# Altium PCB uart.PcbDoc (part 3 of 3)
Units mil, origin at the board's own origin, x right, y up, seen from the top; angles counter-clockwise.
Board outline 2765.94 x 3947.04 mil, 2 copper layers (Top Layer, Bottom Layer); 105 components, 93 nets, 344 pads, 42 vias.
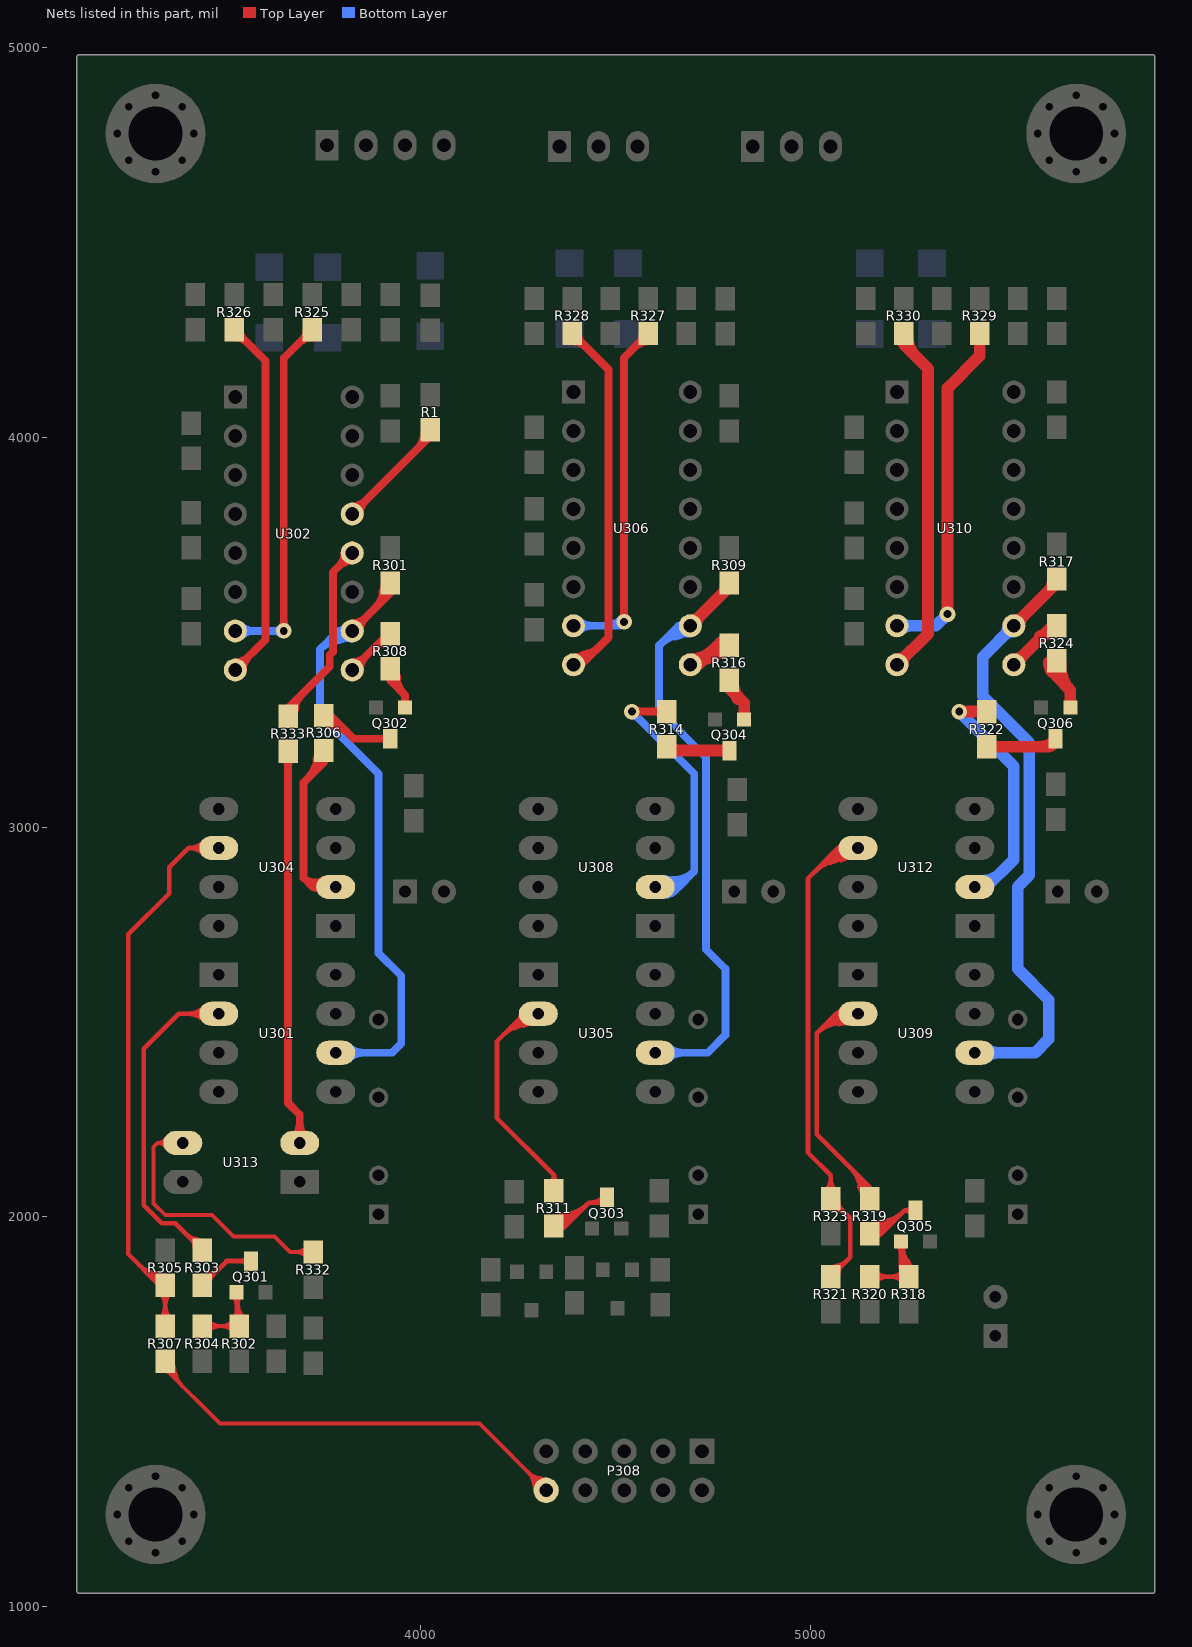
[diagram p3: the nets of this part, all layers, seen from the top]

## Via types
v1: diameter 40, hole 20, Top Layer to Bottom Layer, 40 vias
v2: diameter 50, hole 28, Top Layer to Bottom Layer, 2 vias

## Nets (pads, with @x,y where several pads share a name; then routed paths per layer and width w, separated by ;. In a path a pad name is that pad's centre, name@x,y a point inside that pad or via, vN(x,y) a via of type N, cw(c..) or ccw(c..) an arc to the next point about the centre after c; other vN are vias at no path point) (continued)
NetP308_10: P308.10 R307.2 | length 2076.5
  Top Layer w10: R307.2@3342.55,1615.31 cw(c3335.58,1587.78) 3363,1595.13 ; R307.2@3345,1630 3345,1610 3485,1470 4150.94,1470 P308.10@4322.2,1298.74 ; R307.2@3349.06,1634.14 cw(c3334.8,1602.06) R307.2@3368.71,1611.14 ; R307.2@3360.79,1603.39 cw(c3375.58,1607.35) R307.2@3362.32,1615 ; 3374.14,1590.91 ccw(c3323.86,1577.43) R307.2@3345,1625 ; 4286.47,1329.48 ccw(c4330.94,1341.39) P308.10@4321.7,1296.29 ; 4290.66,1313.85 ccw(c4327.31,1323.67) P308.10@4319.7,1286.49 ; 4291.47,1334.48 cw(c4279.55,1290.01) P308.10@4324.65,1299.24 ; 4307.1,1330.29 cw(c4297.28,1293.64) P308.10@4334.45,1301.25 ; R307.2@3345,1625 ccw(c3381.21,1625) 3355.61,1599.39 cw(c3381.21,1625) R307.2@3345,1625 ; 4275.26,1345.69 cw(c4228.31,1298.74) 4294.7,1298.74 ccw(c4228.31,1298.74) 4275.26,1345.69 ; 4275.26,1345.69 ccw(c4322.2,1392.63) 4322.2,1326.24 cw(c4322.2,1392.63) 4275.26,1345.69 ; 4292.33,1328.61 cw(c4262.46,1298.74) 4304.7,1298.74 ccw(c4262.46,1298.74) 4292.33,1328.61 ; 4292.33,1328.61 ccw(c4322.2,1358.49) 4322.2,1316.24 cw(c4322.2,1358.49) 4292.33,1328.61 ; R307.2@3345,1605 cw(c3345,1592.93) 3353.54,1601.46 ccw(c3345,1592.93) R307.2@3345,1605 ; R307.2@3355,1625 ccw(c3415.36,1625) 3372.68,1582.32 cw(c3415.36,1625) R307.2@3355,1625 ; R307.2@3365,1625 ccw(c3449.5,1625) 3389.75,1565.25 cw(c3449.5,1625) R307.2@3365,1625
NetQ301_1: Q301.1 R302.1 R304.2 | length 867.8
  Top Layer w10: R304.2@3440,1720 R302.1@3535,1720 3527.2,1727.8 Q301.1@3527.2,1806.85 ; Q301.1@3520.28,1795.85 cw(c3509.52,1778.74) 3529.23,1783.23 ; 3532.73,1767.82 cw(c3574.23,1777.26) Q301.1@3538.21,1799.93 ; 3486.72,1720 cw(c3486.72,1671.72) 3520.86,1705.86 ccw(c3486.72,1671.72) 3486.72,1720 ; 3486.72,1720 ccw(c3486.72,1768.28) 3520.86,1734.14 cw(c3486.72,1768.28) 3486.72,1720 ; 3488.28,1720 cw(c3488.28,1768.28) 3454.14,1734.14 ccw(c3488.28,1768.28) 3488.28,1720 ; 3488.28,1720 ccw(c3488.28,1671.72) 3454.14,1705.86 cw(c3488.28,1671.72) 3488.28,1720 ; 3527.2,1775.47 cw(c3558.59,1775.47) 3536.4,1797.66 ccw(c3558.59,1775.47) 3527.2,1775.47 ; 3527.2,1775.47 ccw(c3495.82,1775.47) 3518.01,1797.66 cw(c3495.82,1775.47) 3527.2,1775.47 ; R302.1@3520.86,1739.14 ccw(c3505.54,1754.46) 3527.2,1754.46 cw(c3505.54,1754.46) R302.1@3520.86,1739.14 ; 3527.2,1767.96 ccw(c3577.96,1767.96) 3542.07,1732.07 cw(c3577.96,1767.96) 3527.2,1767.96 ; Q301.1@3527.2,1792.1 ccw(c3602.1,1792.1) 3549.14,1739.14 cw(c3602.1,1792.1) Q301.1@3527.2,1792.1
NetQ301_3: Q301.3 R303.1 | length 463.6
  Top Layer w12: R303.1@3435.21,1831.45 cw(c3467.04,1821.83) R303.1@3458.43,1853.94 ; R303.1@3442.2,1826.85 3502.2,1886.85 Q301.3@3565.2,1886.85 ; 3536.23,1886.85 cw(c3536.23,1857.88) 3556.72,1878.37 ccw(c3536.23,1857.88) 3536.23,1886.85 ; 3536.23,1886.85 ccw(c3536.23,1915.82) 3556.72,1895.34 cw(c3536.23,1915.82) 3536.23,1886.85 ; R303.1@3440,1837 ccw(c3440,1866.83) 3461.09,1845.74 cw(c3440,1866.83) R303.1@3440,1837 ; R303.1@3440,1849 ccw(c3440,1907.8) 3481.58,1866.22 cw(c3440,1907.8) R303.1@3440,1849 ; R303.1@3459,1830 cw(c3491.94,1830) 3468.65,1853.29 ccw(c3491.94,1830) R303.1@3459,1830
NetQ302_1: Q302.1 R308.1 | length 413.5
  Top Layer w20: R308.1@3922.2,3406.85 3922.2,3376.85 3960.2,3338.85 ; R308.1@3925.01,3405.99 cw(c3904.01,3375.05) R308.1@3940.74,3382.07 ; Q302.1@3960.2,3306.85 3960.2,3338.85 ; 3960.2,3326.16 cw(c3940.89,3326.16) 3954.55,3312.51 ccw(c3940.89,3326.16) 3960.2,3326.16 ; 3960.2,3326.16 ccw(c3979.52,3326.16) 3965.86,3312.51 cw(c3979.52,3326.16) 3960.2,3326.16 ; 3960.2,3338.85 cw(c4016.33,3394.98) 3937.16,3400.76 ccw(c4016.33,3394.98) 3960.2,3338.85 ; R308.1@3917.22,3402.21 ccw(c3958.72,3399.18) 3929.3,3369.76 cw(c3958.72,3399.18) R308.1@3917.22,3402.21
NetQ302_3: Q302.3 R306.1 | length 481.7
  Top Layer w20: R306.1@3747.87,3279.35 ccw(c3780.26,3298.05) R306.1@3770.58,3261.93 ; Q302.3@3922.2,3226.85 3828.15,3226.85 3768.15,3286.85 R306.1@3752.2,3286.85 ; R306.1@3752.2,3286.85 cw(c3752.2,3248.36) 3779.42,3275.58 ccw(c3752.2,3248.36) R306.1@3752.2,3286.85 ; 3902.89,3226.85 cw(c3902.89,3207.54) 3916.55,3221.19 ccw(c3902.89,3207.54) 3902.89,3226.85 ; 3902.89,3226.85 ccw(c3902.89,3246.16) 3916.55,3232.51 cw(c3902.89,3246.16) 3902.89,3226.85 ; R306.1@3752.2,3266.85 cw(c3752.2,3180.07) 3813.57,3241.43 ccw(c3752.2,3180.07) R306.1@3752.2,3266.85
NetQ303_3: Q303.3 R311.2 | length 898.4
  Top Layer w12: R311.2@4337.96,1984.5 cw(c4381.07,1957.62) 4369.59,2007.11 ; R311.2@4348.14,1978.15 cw(c4415.84,1935.95) 4397.81,2013.65 ; R311.2@4348.19,1978.22 cw(c4382.39,1957.5) 4372.86,1996.33 ; R311.2@4352.05,1998.1 ccw(c4363.86,2017.59) 4369.29,1995.46 ; R311.2@4360.32,1976.12 cw(c4370.36,1972.94) 4367.85,1983.17 cw(c4366.36,1989.25) R311.2@4360.37,1987.42 ; 4372.2,1976.85 4432.2,2036.85 ; Q303.3@4462.2,2036.85 4432.2,2036.85 ; 4432.2,2036.85 cw(c4345.22,2123.83) 4342.61,2000.85 ccw(c4345.22,2123.83) 4432.2,2036.85 ; R311.2@4341.84,1964.85 ccw(c4342.74,2007) 4372.55,1977.19 cw(c4342.74,2007) R311.2@4341.84,1964.85 ; R311.2@4342.1,1976.85 ccw(c4343.57,2045.94) 4392.43,1997.08 cw(c4343.57,2045.94) R311.2@4342.1,1976.85 ; R311.2@4342.35,1988.85 ccw(c4344.39,2084.88) 4412.32,2016.96 cw(c4344.39,2084.88) R311.2@4342.35,1988.85 ; 4434.18,2036.85 ccw(c4434.18,2086.82) 4469.51,2051.49 cw(c4434.18,2086.82) 4434.18,2036.85
NetQ304_1: Q304.1 R316.1 | length 255.4
  Top Layer w30: R316.1@4787.2,3363.19 cw(c4758.64,3313.72) 4813.82,3328.51 ; R316.1@4792.2,3376.85 4792.2,3356.85 4830.2,3318.85 Q304.1@4830.2,3276.85 ; R316.1@4802.2,3371.85 ccw(c4862.56,3371.85) 4819.88,3329.17 cw(c4862.56,3371.85) R316.1@4802.2,3371.85
NetQ304_3: Q304.3 R314.1 | length 228.9
  Top Layer w30: R314.1@4632.2,3206.85 4642.2,3196.85 Q304.3@4792.2,3196.85 ; R314.1@4639.28,3208.92 ccw(c4668.42,3238.06) 4668.42,3196.85 cw(c4668.42,3238.06) R314.1@4639.28,3208.92
NetQ305_1: Q305.1 R318.1 R320.2 | length 1100.8
  Top Layer w12: R320.2@5152.2,1846.85 R318.1@5252.2,1846.85 5232.2,1866.85 Q305.1@5232.2,1936.85 ; Q305.1@5226.2,1926.46 cw(c5211.72,1901.37) 5239.7,1908.87 cw(c5267.69,1916.36) Q305.1@5242.6,1930.85 ; R318.1@5237.09,1863.37 ccw(c5222.27,1874.66) 5237.67,1885.17 ; R318.1@5238.53,1865.04 ccw(c5218.44,1884.41) 5241.49,1900.13 ; 5241.14,1880.07 ccw(c5259.97,1892.91) R318.1@5255.73,1870.52 ; R318.1@5247.17,1856.71 ccw(c5229.29,1873.95) 5249.8,1887.94 ; 5198.07,1846.85 cw(c5198.07,1892.72) 5165.64,1860.29 ccw(c5198.07,1892.72) 5198.07,1846.85 ; 5198.07,1846.85 ccw(c5198.07,1800.98) 5165.64,1833.42 cw(c5198.07,1800.98) 5198.07,1846.85 ; 5206.33,1846.85 cw(c5206.33,1800.98) 5238.77,1833.42 ccw(c5206.33,1800.98) 5206.33,1846.85 ; 5206.33,1846.85 ccw(c5206.33,1892.72) 5238.77,1860.29 cw(c5206.33,1892.72) 5206.33,1846.85 ; 5232.2,1907.88 cw(c5261.18,1907.88) 5240.69,1928.37 ccw(c5261.18,1907.88) 5232.2,1907.88 ; 5232.2,1907.88 ccw(c5203.23,1907.88) 5223.72,1928.37 cw(c5203.23,1907.88) 5232.2,1907.88 ; Q305.1@5232.2,1936.85 ccw(c5325.32,1936.85) 5264.6,1866.25 cw(c5325.32,1936.85) Q305.1@5232.2,1936.85 ; 5232.2,1884.54 ccw(c5280.33,1884.54) 5248.94,1848.06 cw(c5280.33,1884.54) 5232.2,1884.54 ; 5232.2,1910.69 ccw(c5302.82,1910.69) 5256.77,1857.16 cw(c5302.82,1910.69) 5232.2,1910.69
NetQ305_3: Q305.3 R319.2 | length 998.3
  Top Layer w12: R319.2@5147.96,1964.5 cw(c5191.07,1937.62) 5179.59,1987.11 ; R319.2@5152.2,1956.85 5182.2,1956.85 ; R319.2@5158.14,1958.15 cw(c5225.84,1915.95) 5207.81,1993.65 ; R319.2@5158.19,1958.22 cw(c5192.39,1937.5) 5182.86,1976.33 ; R319.2@5162.05,1978.1 ccw(c5173.86,1997.59) 5179.29,1975.46 ; R319.2@5170.32,1956.12 cw(c5180.36,1952.94) 5177.85,1963.17 cw(c5176.36,1969.25) R319.2@5170.37,1967.42 ; Q305.3@5270.2,2016.85 5242.2,2016.85 ; 5182.2,1956.85 cw(c5182.2,1971.03) 5169.38,1964.97 ccw(c5182.2,1971.03) 5182.2,1956.85 ; 5182.2,1956.85 ccw(c5182.2,1942.67) 5169.38,1948.73 cw(c5182.2,1942.67) 5182.2,1956.85 ; 5182.2,1956.85 5242.2,2016.85 ; 5242.2,2016.85 cw(c5155.22,2103.83) 5152.61,1980.85 ccw(c5155.22,2103.83) 5242.2,2016.85 ; 5242.21,2016.85 cw(c5242.21,1990.19) 5261.51,2008.57 ccw(c5242.21,1990.19) 5242.21,2016.85 ; 5242.21,2016.85 ccw(c5242.21,2043.51) 5261.51,2025.13 cw(c5242.21,2043.51) 5242.21,2016.85 ; R319.2@5151.84,1944.85 ccw(c5152.74,1987) 5182.55,1957.19 cw(c5152.74,1987) R319.2@5151.84,1944.85 ; R319.2@5152.1,1956.85 ccw(c5153.57,2025.94) 5202.43,1977.08 cw(c5153.57,2025.94) R319.2@5152.1,1956.85 ; R319.2@5152.35,1968.85 ccw(c5154.39,2064.88) 5222.32,1996.96 cw(c5154.39,2064.88) R319.2@5152.35,1968.85
NetQ306_1: Q306.1 R324.1 | length 389.3
  Top Layer w30: R324.1@5626.45,3413.68 cw(c5593.55,3366.98) 5649.83,3376.74 ; R324.1@5632.2,3426.85 5632.2,3386.85 5667.2,3351.85 ; Q306.1@5667.2,3306.85 5667.2,3351.85 ; 5667.2,3351.85 cw(c5728.5,3413.15) 5642.16,3420.95 ccw(c5728.5,3413.15) 5667.2,3351.85 ; R324.1@5612.29,3423.65 ccw(c5645.36,3420.66) 5621.88,3397.18 cw(c5645.36,3420.66) R324.1@5612.29,3423.65
NetQ306_3: Q306.3 R322.1 | length 351.5
  Top Layer w30: R322.1@5452.2,3206.85 5609.2,3206.85 ; Q306.3@5629.2,3226.85 5609.2,3206.85 ; 5609.21,3206.85 ccw(c5609.21,3224.35) 5626.28,3220.51 cw(c5609.21,3224.35) 5609.21,3206.85 ; 5590.58,3206.85 ccw(c5590.58,3258.48) 5627.08,3221.97 cw(c5590.58,3258.48) 5590.58,3206.85 ; Q306.3@5612.13,3209.78 cw(c5629.2,3192.71) 5629.2,3216.85 ccw(c5629.2,3192.71) Q306.3@5612.13,3209.78
NetR1_2: R1.2 U302.13 | length 620.8
  Top Layer w20: U302.13@3824.26,3803.8 cw(c3857.32,3797.03) 3848.59,3829.62 ; U302.13@3824.72,3803.7 4025,4003.98 R1.2@4025,4020 ; U302.13@3824.82,3803.24 ccw(c3818.05,3836.3) 3850.65,3827.56 ; 3858.06,3837.04 cw(c3824.72,3870.37) 3824.72,3823.23 ccw(c3824.72,3870.37) 3858.06,3837.04 ; 3858.06,3837.04 ccw(c3891.4,3803.7) 3844.25,3803.7 cw(c3891.4,3803.7) 3858.06,3837.04 ; 3991.6,3970.57 ccw(c3947.17,4015) 4010,4015 cw(c3947.17,4015) 3991.6,3970.57
NetR301_2: R301.2 U301.6 U302.10 | length 2616.7
  Top Layer w20: U302.10@3824.26,3503.8 cw(c3857.32,3497.03) 3848.59,3529.62 ; U302.10@3824.72,3503.7 3922.2,3601.18 R301.2@3922.2,3626.85 ; U302.10@3824.82,3503.24 ccw(c3818.05,3536.3) 3850.65,3527.56 ; R301.2@3902.28,3603.47 cw(c3938.4,3593.79) R301.2@3919.7,3626.18 ; 3858.06,3537.04 cw(c3824.72,3570.37) 3824.72,3523.23 ccw(c3824.72,3570.37) 3858.06,3537.04 ; 3858.06,3537.04 ccw(c3891.4,3503.7) 3844.25,3503.7 cw(c3891.4,3503.7) 3858.06,3537.04 ; 3881.98,3560.96 ccw(c3821.09,3621.85) 3907.2,3621.85 cw(c3821.09,3621.85) 3881.98,3560.96 ; 3916.12,3595.1 ccw(c3889.38,3621.85) 3927.2,3621.85 cw(c3889.38,3621.85) 3916.12,3595.1
  Bottom Layer w20: U301.6@3782.2,2421.42 3926.77,2421.42 3950.35,2445 3950.35,2618.7 3892.2,2676.85 3892.2,3136.85 3742.2,3286.85 3742.2,3456.85 ; 3783.33,3478.94 ccw(c3774.67,3541.61) U302.10@3825.1,3503.42 ; U302.10@3806.38,3510.39 cw(c3791.06,3515.97) 3793.29,3499.82 cw(c3795.42,3484.4) U302.10@3808.41,3492.96 ; U302.10@3824.72,3503.7 3789.06,3503.7 ; 3742.21,3456.85 cw(c3810.33,3388.73) 3822.3,3484.32 ccw(c3810.33,3388.73) 3742.21,3456.85 ; 3742.2,3456.85 3789.06,3503.7 ; 3789.06,3503.7 cw(c3789.06,3480.89) 3808.27,3493.18 ccw(c3789.06,3480.89) 3789.06,3503.7 ; 3789.06,3503.7 ccw(c3789.06,3526.51) 3808.27,3514.22 cw(c3789.06,3526.51) 3789.06,3503.7 ; 3851.9,2421.42 cw(c3851.9,2472.12) 3816.05,2436.27 ccw(c3851.9,2472.12) 3851.9,2421.42 ; 3851.9,2421.42 ccw(c3851.9,2370.72) 3816.05,2406.57 cw(c3851.9,2370.72) 3851.9,2421.42 ; 3771.12,3485.76 cw(c3816.76,3440.11) 3824.78,3504.17 ccw(c3816.76,3440.11) 3771.12,3485.76
NetR303_2: R303.2 U301.2 | length 1340
  Top Layer w12: R303.2@3421.72,1943.9 cw(c3413.19,1912.06) R303.2@3444.79,1921.42 ; R303.2@3440,1915 3371,1984 3336,1984 3290,2030 3290,2431.42 3380,2521.42 U301.2@3482.2,2521.42 ; 3402.85,2521.42 cw(c3402.85,2461.06) 3445.53,2503.74 ccw(c3402.85,2461.06) 3402.85,2521.42 ; 3402.85,2521.42 ccw(c3402.85,2581.77) 3445.53,2539.09 cw(c3402.85,2581.77) 3402.85,2521.42 ; 3431.82,2521.42 cw(c3431.82,2490.03) 3454.01,2512.22 ccw(c3431.82,2490.03) 3431.82,2521.42 ; 3431.82,2521.42 ccw(c3431.82,2552.8) 3454.01,2530.61 cw(c3431.82,2552.8) 3431.82,2521.42 ; 3399.03,1955.97 ccw(c3440,1996.94) 3440,1939 cw(c3440,1996.94) 3399.03,1955.97 ; 3411.1,1943.9 cw(c3387.2,1920) 3421,1920 ccw(c3387.2,1920) 3411.1,1943.9 ; R303.2@3419.51,1935.49 ccw(c3440,1955.97) 3440,1927 cw(c3440,1955.97) R303.2@3419.51,1935.49
NetR305_1: R305.1 R307.1 U304.6 | length 2360.7
  Top Layer w12: 3293.74,1862.74 cw(c3275.1,1793.19) R305.1@3338.81,1826.74 ; 3318.21,1844.18 ccw(c3324.11,1866.19) R305.1@3335.5,1846.45 ; 3320.25,1855.63 cw(c3308.19,1810.61) R305.1@3349.42,1832.33 ; R305.1@3322.36,1843.07 cw(c3316.4,1820.81) R305.1@3338.34,1827.86 ; R307.1@3345,1720 R305.1@3345,1825 ; U304.6@3513.15,2946.85 U304.6@3482.2,2946.85 3405,2946.85 ; 3345,1770.87 cw(c3299.13,1770.87) 3331.56,1738.44 ccw(c3299.13,1770.87) 3345,1770.87 ; 3345,1770.87 ccw(c3390.87,1770.87) 3358.44,1738.44 cw(c3390.87,1770.87) 3345,1770.87 ; 3345,1774.13 cw(c3390.87,1774.13) 3358.44,1806.56 ccw(c3390.87,1774.13) 3345,1774.13 ; 3345,1774.13 ccw(c3299.13,1774.13) 3331.56,1806.56 cw(c3299.13,1774.13) 3345,1774.13 ; R305.1@3345,1825 cw(c3345,1861.21) 3319.39,1835.61 ccw(c3345,1861.21) R305.1@3345,1825 ; R305.1@3345,1825 3330,1825 3250,1905 3250,2725 3355,2830 3355,2896.85 3405,2946.85 ; 3405,2946.85 cw(c3405,2891.6) 3445.07,2929.64 ccw(c3405,2891.6) 3405,2946.85 ; 3405,2946.85 ccw(c3405,3002.1) 3445.07,2964.06 cw(c3405,3002.1) 3405,2946.85 ; 3278.42,1876.58 ccw(c3345,1943.15) 3345,1849 cw(c3345,1943.15) 3278.42,1876.58 ; 3298.91,1856.09 ccw(c3345,1902.18) 3345,1837 cw(c3345,1902.18) 3298.91,1856.09
NetR306_2: R306.2 U304.2 | length 1052.4
  Top Layer w20: R306.2@3732.28,3173.47 cw(c3768.4,3163.79) R306.2@3749.7,3196.18 ; R306.2@3752.2,3196.85 3752.2,3167.2 3700,3115 3700,2870 ; U304.2@3782.2,2846.85 3723.15,2846.85 ; 3700,2870 ccw(c3729.32,2899.31) 3751.81,2864.49 cw(c3729.32,2899.31) 3700,2870 ; 3700,2870 3723.15,2846.85 ; 3723.15,2846.85 cw(c3723.15,2819.15) 3745.93,2834.91 ccw(c3723.15,2819.15) 3723.15,2846.85 ; 3723.15,2846.85 ccw(c3723.15,2874.55) 3745.93,2858.79 cw(c3723.15,2874.55) 3723.15,2846.85 ; 3709.17,3124.17 ccw(c3641.49,3191.85) 3737.2,3191.85 cw(c3641.49,3191.85) 3709.17,3124.17 ; 3717.51,2852.49 ccw(c3743.06,2878.04) 3762.66,2847.69 cw(c3743.06,2878.04) 3717.51,2852.49 ; 3743.31,3158.31 ccw(c3709.78,3191.85) 3757.2,3191.85 cw(c3709.78,3191.85) 3743.31,3158.31
  Bottom Layer w20: U304.2@3782.2,2846.85 U304.2@3822.2,2846.85
NetR308_2: R308.2 U302.9 | length 451.2
  Top Layer w20: U302.9@3824.26,3403.8 cw(c3857.32,3397.03) 3848.59,3429.62 ; U302.9@3824.72,3403.7 3917.87,3496.85 R308.2@3922.2,3496.85 ; U302.9@3824.82,3403.24 ccw(c3818.05,3436.3) 3850.65,3427.56 ; 3858.06,3437.04 cw(c3824.72,3470.37) 3824.72,3423.23 ccw(c3824.72,3470.37) 3858.06,3437.04 ; 3858.06,3437.04 ccw(c3891.4,3403.7) 3844.25,3403.7 cw(c3891.4,3403.7) 3858.06,3437.04 ; 3880.67,3459.65 cw(c3922.2,3418.11) 3922.2,3476.85 ccw(c3922.2,3418.11) 3880.67,3459.65
NetR309_2: R309.2 U305.6 U306.10 | length 2289
  Top Layer w30: U306.10@4692.2,3516.85 4792.2,3616.85 R309.2@4792.2,3626.85 R309.2@4782.2,3616.85 ; 4717,3541.65 cw(c4692.2,3566.45) 4692.2,3531.38 ccw(c4692.2,3566.45) 4717,3541.65 ; 4717,3541.65 ccw(c4741.8,3516.85) 4706.73,3516.85 cw(c4741.8,3516.85) 4717,3541.65 ; 4771.6,3596.24 ccw(c4745.99,3621.85) 4782.2,3621.85 cw(c4745.99,3621.85) 4771.6,3596.24
  Bottom Layer w20: U305.6@4602.2,2421.42 4736.77,2421.42 4782.2,2466.85 4782.2,2636.85 4732.2,2686.85 4732.2,3180 4612.2,3300 4612.2,3466.85 ; 4652.79,3489.04 ccw(c4639.43,3550.87) U306.10@4692.6,3516.59 ; U306.10@4673.43,3522.21 cw(c4657.53,3526.74) 4661.02,3510.58 cw(c4664.35,3495.16) U306.10@4676.8,3504.85 ; U306.10@4692.2,3516.85 4662.2,3516.85 ; 4612.21,3466.85 cw(c4686.13,3392.93) 4691.25,3497.35 ccw(c4686.13,3392.93) 4612.21,3466.85 ; 4612.2,3466.85 4662.2,3516.85 ; 4662.21,3516.85 cw(c4662.21,3503.57) 4674.35,3508.95 ccw(c4662.21,3503.57) 4662.21,3516.85 ; 4662.21,3516.85 ccw(c4662.21,3530.13) 4674.35,3524.75 cw(c4662.21,3530.13) 4662.21,3516.85 ; 4671.9,2421.42 cw(c4671.9,2472.12) 4636.05,2436.27 ccw(c4671.9,2472.12) 4671.9,2421.42 ; 4671.9,2421.42 ccw(c4671.9,2370.72) 4636.05,2406.57 cw(c4671.9,2370.72) 4671.9,2421.42 ; 4644.12,3498.76 cw(c4689.11,3453.77) 4692.23,3517.32 ccw(c4689.11,3453.77) 4644.12,3498.76
NetR311_1: R311.1 U305.2 | length 1192.8
  Top Layer w12: 4240,2484.84 ccw(c4223.51,2546.37) U305.2@4282.28,2521.8 ; 4245.77,2498.39 ccw(c4236.85,2531.7) U305.2@4270.51,2524.23 ; 4257.44,2501.51 cw(c4261.96,2484.63) U305.2@4270.7,2499.77 ; 4263.6,2491.16 ccw(c4251.99,2534.46) U305.2@4293.35,2517.17 ; U305.2@4302.2,2521.42 4266.77,2521.42 4196.2,2450.85 4196.2,2253.8 4342.2,2107.8 ; R311.1@4342.2,2066.85 4342.2,2107.8 ; 4342.2,2107.79 cw(c4317.71,2107.79) 4331.5,2087.55 ccw(c4317.71,2107.79) 4342.2,2107.79 ; 4342.2,2107.79 ccw(c4366.7,2107.79) 4352.91,2087.55 cw(c4366.7,2107.79) 4342.2,2107.79 ; 4212.47,2467.12 cw(c4283.2,2396.39) 4283.2,2496.42 ccw(c4283.2,2396.39) 4212.47,2467.12 ; 4232.96,2487.6 cw(c4283.2,2437.36) 4283.2,2508.42 ccw(c4283.2,2437.36) 4232.96,2487.6 ; 4252.15,2506.79 ccw(c4237.52,2521.42) 4258.2,2521.42 cw(c4237.52,2521.42) 4252.15,2506.79 ; 4253.44,2508.09 cw(c4283.2,2478.33) 4283.2,2520.42 ccw(c4283.2,2478.33) 4253.44,2508.09
NetR314_2: R314.2 U308.2 | length 1483.9
  Top Layer w20: v1(4542.2,3296.85) R314.2@4632.2,3296.85 ; 4566.35,3296.85 cw(c4566.35,3320.99) 4549.28,3303.92 ccw(c4566.35,3320.99) 4566.35,3296.85 ; 4566.35,3296.85 ccw(c4566.35,3272.71) 4549.28,3289.78 cw(c4566.35,3272.71) 4566.35,3296.85 ; 4595.99,3296.85 cw(c4595.99,3260.64) 4621.6,3286.24 ccw(c4595.99,3260.64) 4595.99,3296.85 ; 4595.99,3296.85 ccw(c4595.99,3333.06) 4621.6,3307.46 cw(c4595.99,3333.06) 4595.99,3296.85
  Bottom Layer w20: v1(4542.2,3296.85) 4702.2,3136.85 4702.2,2886.85 ; U308.2@4602.2,2846.85 4662.2,2846.85 ; U308.2@4621.9,2846.14 cw(c4672.05,2794.93) 4672.8,2866.6 ; 4559.28,3279.78 cw(c4576.35,3296.85) 4552.2,3296.85 ccw(c4576.35,3296.85) 4559.28,3279.78 ; 4559.28,3279.78 ccw(c4542.2,3262.71) 4542.2,3286.85 cw(c4542.2,3262.71) 4559.28,3279.78 ; 4662.2,2846.85 cw(c4662.2,2876.37) 4638.25,2859.12 ccw(c4662.2,2876.37) 4662.2,2846.85 ; 4662.2,2846.85 ccw(c4662.2,2817.33) 4638.25,2834.58 cw(c4662.2,2817.33) 4662.2,2846.85 ; 4662.2,2846.85 4702.2,2886.85 ; 4702.2,2886.85 cw(c4647.61,2941.44) 4626.85,2867.08 ccw(c4647.61,2941.44) 4702.2,2886.85 ; U308.2@4616.1,2828.55 ccw(c4626.48,2865.76) 4653.8,2838.44 cw(c4626.48,2865.76) U308.2@4616.1,2828.55 ; U308.2@4621.47,2847.81 ccw(c4637.05,2903.6) 4678,2862.64 cw(c4637.05,2903.6) U308.2@4621.47,2847.81
NetR316_2: R316.2 U306.9 | length 582.9
  Top Layer w12: U306.9@4692.2,3416.85 U306.9@4692.2,3424.48
  Top Layer w30: U306.9@4692.2,3416.85 4712.2,3416.85 4762.2,3466.85 R316.2@4792.2,3466.85 ; U306.9@4695.96,3430.88 ccw(c4712.85,3493.9) 4745.47,3437.4 ; 4748.86,3440.24 ccw(c4734.08,3495.41) R316.2@4783.54,3466.85 ; U306.9@4692.2,3431.38 ccw(c4692.2,3514.73) 4751.15,3455.79 cw(c4692.2,3514.73) U306.9@4692.2,3431.38 ; U306.9@4715.38,3420.03 cw(c4792.2,3343.21) 4792.2,3451.85 ccw(c4792.2,3343.21) U306.9@4715.38,3420.03 ; 4766.6,3471.24 cw(c4792.2,3445.64) 4792.2,3481.85 ccw(c4792.2,3445.64) 4766.6,3471.24
NetR317_2: R317.2 U309.6 U310.10 | length 1957.2
  Top Layer w30: U310.10@5522.2,3516.85 5632.2,3626.85 R317.2@5632.2,3636.85 ; 5547,3541.65 cw(c5522.2,3566.45) 5522.2,3531.38 ccw(c5522.2,3566.45) 5547,3541.65 ; 5547,3541.65 ccw(c5571.8,3516.85) 5536.73,3516.85 cw(c5571.8,3516.85) 5547,3541.65 ; 5611.6,3606.24 ccw(c5585.99,3631.85) 5622.2,3631.85 cw(c5585.99,3631.85) 5611.6,3606.24
  Bottom Layer w30: U309.6@5422.2,2421.42 5576.77,2421.42 5612.2,2456.85 5612.2,2556.85 5532.2,2636.85 5532.2,2846.85 5562.2,2876.85 5562.2,3216.85 5442.2,3336.85 5442.2,3436.85 U310.10@5522.2,3516.85 ; 5479.83,2421.42 cw(c5479.83,2460.04) 5452.52,2432.73 ccw(c5479.83,2460.04) 5479.83,2421.42 ; 5479.83,2421.42 ccw(c5479.83,2382.79) 5452.52,2410.1 cw(c5479.83,2382.79) 5479.83,2421.42 ; 5497.4,3492.05 cw(c5522.2,3467.25) 5522.2,3502.32 ccw(c5522.2,3467.25) 5497.4,3492.05 ; 5497.4,3492.05 ccw(c5472.6,3516.85) 5507.68,3516.85 cw(c5472.6,3516.85) 5497.4,3492.05
NetR319_1: R319.1 U309.2 | length 1917.9
  Top Layer w12: 5044.77,2492.19 ccw(c5037.54,2576.74) 5102.44,2522.06 cw(c5067.81,2551.24) 5071.66,2506.12 ; 5073.63,2494.65 ccw(c5068.88,2550.34) U309.2@5111.62,2514.33 ; 5074.34,2506.35 cw(c5075.83,2488.93) U309.2@5087.1,2502.3 ; U309.2@5079.18,2528.32 cw(c5064.4,2532.56) 5065.71,2517.24 cw(c5067.13,2500.7) U309.2@5081.52,2508.97 ; 5118.64,2106.22 ccw(c5195.48,2126.81) R319.1@5155.7,2057.91 ; U309.2@5122.2,2521.42 5066.77,2521.42 ; 5126.13,2078.24 ccw(c5175,2091.33) R319.1@5149.7,2047.52 ; R319.1@5135.75,2061.35 ccw(c5116.02,2072.74) 5138.03,2078.64 ; 5138.28,2077.71 ccw(c5166.84,2085.36) R319.1@5155.01,2058.27 ; R319.1@5152.2,2046.85 5152.2,2076.85 5016.2,2212.85 5016.2,2470.85 ; 5016.21,2470.85 cw(c5082.38,2404.69) 5098.81,2496.81 ccw(c5082.38,2404.69) 5016.21,2470.85 ; 5016.2,2470.85 5066.77,2521.42 ; 5066.77,2521.42 cw(c5066.77,2507.37) 5079.88,2512.42 ccw(c5066.77,2507.37) 5066.77,2521.42 ; 5066.77,2521.42 ccw(c5066.77,2535.46) 5079.88,2530.41 cw(c5066.77,2535.46) 5066.77,2521.42 ; 5032.47,2487.11 cw(c5087.3,2432.28) 5100.92,2508.62 ccw(c5087.3,2432.28) 5032.47,2487.11 ; 5048.73,2503.37 cw(c5092.22,2459.88) 5103.03,2520.43 ccw(c5092.22,2459.88) 5048.73,2503.37 ; 5064.99,2519.63 cw(c5097.15,2487.47) 5105.14,2532.25 ccw(c5097.15,2487.47) 5064.99,2519.63 ; 5102.09,2126.96 cw(c5026.98,2051.85) 5133.2,2051.85 ccw(c5026.98,2051.85) 5102.09,2126.96 ; 5122.58,2106.48 cw(c5067.95,2051.85) 5145.2,2051.85 ccw(c5067.95,2051.85) 5122.58,2106.48 ; 5143.06,2085.99 cw(c5108.92,2051.85) 5157.2,2051.85 ccw(c5108.92,2051.85) 5143.06,2085.99
NetR321_1: R321.1 R323.1 U312.6 | length 2670.2
  Top Layer w12: R321.1@5047.41,1853.27 cw(c5079.02,1843.91) R321.1@5070.48,1875.75 ; R323.1@5047.41,2040.43 ccw(c5079.02,2049.79) R323.1@5070.48,2017.95 ; 5050.92,2908.43 ccw(c5030.17,2989.27) U312.6@5102.34,2947.35 ; R321.1@5052.2,1846.85 5102.2,1896.85 5102.2,1996.85 R323.1@5052.2,2046.85 5052.2,2106.85 4994.2,2164.85 4994.2,2868.85 5072.2,2946.85 U312.6@5122.2,2946.85 ; 5053.81,2920.61 ccw(c5038.82,2976.54) U312.6@5091.4,2952.29 ; 5077.44,2926.95 cw(c5081.96,2910.06) U312.6@5090.7,2925.2 ; 5078.53,2927.24 ccw(c5069.05,2962.6) U312.6@5102.3,2947.27 ; 5078.66,2915.55 ccw(c5064.93,2969.09) U312.6@5112.72,2941.33 ; U312.6@5078.7,2951.81 cw(c5057.31,2956.15) 5062.96,2935.07 cw(c5069.06,2912.3) U312.6@5085.63,2929.07 ; 5052.2,2097.72 cw(c5006.33,2097.72) 5038.77,2065.29 ccw(c5006.33,2097.72) 5052.2,2097.72 ; 5052.2,2097.72 ccw(c5098.07,2097.72) 5065.64,2065.29 cw(c5098.07,2097.72) 5052.2,2097.72 ; 5007.61,2882.25 cw(c5103.2,2786.65) 5103.2,2921.85 ccw(c5103.2,2786.65) 5007.61,2882.25 ; 5028.09,2902.74 cw(c5103.2,2827.62) 5103.2,2933.85 ccw(c5103.2,2827.62) 5028.09,2902.74 ; 5048.58,2923.22 cw(c5103.2,2868.6) 5103.2,2945.85 ccw(c5103.2,2868.6) 5048.58,2923.22 ; R321.1@5052.2,1858.85 ccw(c5052.2,1887.82) 5072.69,1867.34 cw(c5052.2,1887.82) R321.1@5052.2,1858.85 ; R321.1@5052.2,1870.85 ccw(c5052.2,1928.79) 5093.18,1887.82 cw(c5052.2,1928.79) R321.1@5052.2,1870.85 ; R323.1@5052.2,2022.85 cw(c5052.2,1964.91) 5093.18,2005.88 ccw(c5052.2,1964.91) R323.1@5052.2,2022.85 ; R323.1@5052.2,2034.85 cw(c5052.2,2005.88) 5072.69,2026.37 ccw(c5052.2,2005.88) R323.1@5052.2,2034.85 ; 5069.06,2943.71 cw(c5103.2,2909.57) 5103.2,2957.85 ccw(c5103.2,2909.57) 5069.06,2943.71 ; R321.1@5071.2,1851.85 cw(c5105,1851.85) 5081.1,1875.75 ccw(c5105,1851.85) R321.1@5071.2,1851.85 ; R323.1@5071.2,2041.85 ccw(c5105,2041.85) 5081.1,2017.95 cw(c5105,2041.85) R323.1@5071.2,2041.85
NetR322_2: R322.2 U312.2 | length 739.4
  Top Layer w30: v1(5382.2,3296.85) R322.2@5452.2,3296.85
  Bottom Layer w30: v1(5382.2,3296.85) 5522.2,3156.85 5522.2,2916.85 5452.2,2846.85 U312.2@5422.2,2846.85 ; U312.2@5441.2,2862.85 ccw(c5441.2,2928.03) 5487.3,2881.94 cw(c5441.2,2928.03) U312.2@5441.2,2862.85
NetR324_2: R324.2 U310.9 | length 401.3
  Top Layer w30: U310.9@5522.2,3416.85 5622.2,3516.85 R324.2@5632.2,3516.85 ; 5588.86,3490.24 ccw(c5574.08,3545.41) R324.2@5623.54,3516.85 ; 5547,3441.65 cw(c5522.2,3466.45) 5522.2,3431.38 ccw(c5522.2,3466.45) 5547,3441.65 ; 5547,3441.65 ccw(c5571.8,3416.85) 5536.73,3416.85 cw(c5571.8,3416.85) 5547,3441.65 ; 5589.53,3484.17 cw(c5632.2,3441.5) 5632.2,3501.85 ccw(c5632.2,3441.5) 5589.53,3484.17
NetR325_2: R325.2 U302.7 | length 1341.3
  Top Layer w20: v1(3649.06,3503.7) 3649.06,4203.7 R325.2@3722.2,4276.85 ; 3649.06,3527.84 cw(c3624.91,3527.84) 3641.98,3510.77 ccw(c3624.91,3527.84) 3649.06,3527.84 ; 3649.06,3527.84 ccw(c3673.2,3527.84) 3656.13,3510.77 cw(c3673.2,3527.84) 3649.06,3527.84 ; 3688.06,4242.71 cw(c3722.2,4208.57) 3722.2,4256.85 ccw(c3722.2,4208.57) 3688.06,4242.71 ; R325.2@3700.13,4254.78 ccw(c3683.06,4271.85) 3707.2,4271.85 cw(c3683.06,4271.85) R325.2@3700.13,4254.78
  Bottom Layer w20: U302.7@3524.72,3503.7 v1(3649.06,3503.7) ; 3571.87,3503.7 cw(c3571.87,3550.84) 3538.53,3517.51 ccw(c3571.87,3550.84) 3571.87,3503.7 ; 3571.87,3503.7 ccw(c3571.87,3456.56) 3538.53,3489.89 cw(c3571.87,3456.56) 3571.87,3503.7 ; 3624.91,3503.7 cw(c3624.91,3479.56) 3641.98,3496.63 ccw(c3624.91,3479.56) 3624.91,3503.7 ; 3624.91,3503.7 ccw(c3624.91,3527.84) 3641.98,3510.77 cw(c3624.91,3527.84) 3624.91,3503.7
NetR326_2: R326.2 U302.8 | length 1275
  Top Layer w20: R326.2@3522.2,4276.85 3602.2,4196.85 3602.2,3481.18 U302.8@3524.72,3403.7 ; U302.8@3524.26,3403.8 cw(c3557.32,3397.03) 3548.59,3429.62 ; U302.8@3524.82,3403.24 ccw(c3518.05,3436.3) 3550.65,3427.56 ; 3558.06,3437.04 cw(c3524.72,3470.37) 3524.72,3423.23 ccw(c3524.72,3470.37) 3558.06,3437.04 ; 3558.06,3437.04 ccw(c3591.4,3403.7) 3544.25,3403.7 cw(c3591.4,3403.7) 3558.06,3437.04 ; R326.2@3522.2,4256.85 cw(c3522.2,4208.57) 3556.35,4242.71 ccw(c3522.2,4208.57) R326.2@3522.2,4256.85 ; R326.2@3537.2,4271.85 ccw(c3561.35,4271.85) 3544.28,4254.78 cw(c3561.35,4271.85) R326.2@3537.2,4271.85
NetR327_2: R327.2 U306.7 | length 1352.6
  Top Layer w20: v1(4522.2,3526.85) 4522.2,4204.35 R327.2@4584.7,4266.85 ; 4522.2,3550.99 cw(c4498.06,3550.99) 4515.13,3533.92 ccw(c4498.06,3550.99) 4522.2,3550.99 ; 4522.2,3550.99 ccw(c4546.35,3550.99) 4529.28,3533.92 cw(c4546.35,3550.99) 4522.2,3550.99 ; 4550.56,4232.71 cw(c4584.7,4198.57) 4584.7,4246.85 ccw(c4584.7,4198.57) 4550.56,4232.71 ; R327.2@4562.63,4244.78 ccw(c4545.56,4261.85) 4569.7,4261.85 cw(c4545.56,4261.85) R327.2@4562.63,4244.78
  Bottom Layer w20: U306.7@4392.2,3516.85 4512.2,3516.85 v1(4522.2,3526.85) ; 4493.84,3521.63 cw(c4503.15,3505.5) v1@4515.55,3519.39 ; 4439.35,3516.85 cw(c4439.35,3563.99) 4406.01,3530.66 ccw(c4439.35,3563.99) 4439.35,3516.85 ; 4439.35,3516.85 ccw(c4439.35,3469.71) 4406.01,3503.04 cw(c4439.35,3469.71) 4439.35,3516.85 ; 4473.92,3516.85 ccw(c4473.92,3575.13) 4515.13,3533.92 cw(c4473.92,3575.13) 4473.92,3516.85
NetR328_2: R328.2 U306.8 | length 1322.4
  Top Layer w20: R328.2@4389.7,4266.85 4482.2,4174.35 4482.2,3486.85 4412.2,3416.85 U306.8@4392.2,3416.85 ; U306.8@4391.79,3417.07 cw(c4442.39,3390.8) 4427.63,3445.87 ; R328.2@4389.7,4246.85 cw(c4389.7,4198.57) 4423.85,4232.71 ccw(c4389.7,4198.57) R328.2@4389.7,4246.85 ; U306.8@4392.2,3416.38 ccw(c4392.2,3463.52) 4425.54,3430.19 cw(c4392.2,3463.52) U306.8@4392.2,3416.38 ; U306.8@4392.2,3436.38 ccw(c4392.2,3531.81) 4459.68,3464.33 cw(c4392.2,3531.81) U306.8@4392.2,3436.38 ; R328.2@4404.7,4261.85 ccw(c4428.85,4261.85) 4411.78,4244.78 cw(c4428.85,4261.85) R328.2@4404.7,4261.85
NetR329_2: R329.2 U310.7 | length 1006.8
  Top Layer w30: v1(5352.2,3546.85) 5352.2,4126.85 5434.7,4209.35 R329.2@5434.7,4266.85
  Bottom Layer w30: U310.7@5222.2,3516.85 5322.2,3516.85 v1(5352.2,3546.85) ; 5257.28,3516.85 cw(c5257.28,3551.92) 5232.48,3527.12 ccw(c5257.28,3551.92) 5257.28,3516.85 ; 5257.28,3516.85 ccw(c5257.28,3481.78) 5232.48,3506.58 cw(c5257.28,3481.78) 5257.28,3516.85
NetR330_2: R330.2 U310.8 | length 1187.3
  Top Layer w30: U310.8@5222.2,3416.85 5302.2,3496.85 5302.2,4176.85 5239.7,4239.35 R330.2@5239.7,4266.85 ; R330.2@5234.7,4253.19 cw(c5206.14,4203.72) 5261.32,4218.51 ; 5247,3441.65 cw(c5222.2,3466.45) 5222.2,3431.38 ccw(c5222.2,3466.45) 5247,3441.65 ; 5247,3441.65 ccw(c5271.8,3416.85) 5236.73,3416.85 cw(c5271.8,3416.85) 5247,3441.65 ; R330.2@5249.7,4261.85 ccw(c5328.17,4261.85) 5272.69,4206.37 cw(c5328.17,4261.85) R330.2@5249.7,4261.85
NetR332_2: R332.2 U313.3 | length 951.6
  Top Layer w10: U313.3@3390,2190 3325,2190 ; R332.2@3725,1910 3665,1910 3625,1950 3520,1950 3465,2005 3345,2005 3315,2035 3315,2180 3325,2190 ; 3325,2190 cw(c3325,2162.31) 3348.72,2176.59 ccw(c3325,2162.31) 3325,2190 ; 3325,2190 ccw(c3325,2217.69) 3348.72,2203.41 cw(c3325,2217.69) 3325,2190 ; 3676.72,1910 cw(c3676.72,1861.72) 3710.86,1895.86 ccw(c3676.72,1861.72) 3676.72,1910 ; 3676.72,1910 ccw(c3676.72,1958.28) 3710.86,1924.14 cw(c3676.72,1958.28) 3676.72,1910
NetR333_1: R333.1 U313.2 | length 1297.5
  Top Layer w20: R333.1@3660,3195 3660,2292.57 3690,2262.57 U313.2@3690,2190 ; 3660,3153.79 cw(c3696.21,3153.79) 3670.61,3179.39 ccw(c3696.21,3153.79) 3660,3153.79 ; 3660,3153.79 ccw(c3623.79,3153.79) 3649.39,3179.39 cw(c3623.79,3153.79) 3660,3153.79 ; 3690,2240.7 cw(c3639.3,2240.7) 3675.15,2204.85 ccw(c3639.3,2240.7) 3690,2240.7 ; 3690,2240.7 ccw(c3740.7,2240.7) 3704.85,2204.85 cw(c3740.7,2240.7) 3690,2240.7
  Bottom Layer w20: U313.2@3685,2195 U313.2@3690,2190
NetR333_2: R333.2 U302.12 | length 873.4
  Top Layer w20: R333.2@3660,3285 3660,3305.15 3767.2,3412.35 3767.2,3442.2 3775,3450 3775,3653.98 U302.12@3824.72,3703.7 U302.12@3824.72,3724.72 ; R333.2@3662.29,3285.56 ccw(c3646.72,3315.76) R333.2@3679.55,3306.97 ; 3798.8,3679.84 cw(c3831.4,3671.1) U302.12@3824.63,3704.16 ; 3800.86,3677.78 ccw(c3792.13,3710.38) U302.12@3825.19,3703.61 ; 3791.39,3670.37 cw(c3824.72,3637.03) 3824.72,3684.17 ccw(c3824.72,3637.03) 3791.39,3670.37 ; 3791.39,3670.37 ccw(c3758.05,3703.7) 3805.2,3703.7 cw(c3758.05,3703.7) 3791.39,3670.37 ; R333.2@3675,3290 cw(c3747.78,3290) 3696.32,3341.47 ccw(c3747.78,3290) R333.2@3675,3290
pads on no net: D308.3 D309.3 P308.3 U301.1 U301.4 U301.7 U302.11 U302.14 U304.1 U304.4 U304.7 U305.1 U305.4 U305.7 U306.11 U306.12 U306.13 U306.14 U308.1 U308.4 U308.7 U309.1 U309.4 U309.7 U310.11 U310.12 U310.13 U310.14 U312.1 U312.4 U312.7

## Keep-outs
Keep-Out Layer:
  lines w10: 3123.15,1039.84 3123.15,4976.85 5879.06,4976.85 5879.06,1039.84 3123.15,1039.84

## Other copper
Top Layer:
  text "USART" at 3255,2965 h78.74 r90
  text "VER1.1" at 3355,2965 h78.74 r90